# Altium PCB SBM_BMS.PcbDoc (part 3 of 4)
Units mil, origin at the board's own origin, x right, y up, seen from the top; angles counter-clockwise.
Board outline 7537.59 x 2875 mil, 2 copper layers (Top Layer, Bottom Layer), stack 64.961 mil thick; 180 components, 137 nets, 631 pads, 494 vias.
Unrouted connection lines stored in the file: 10.
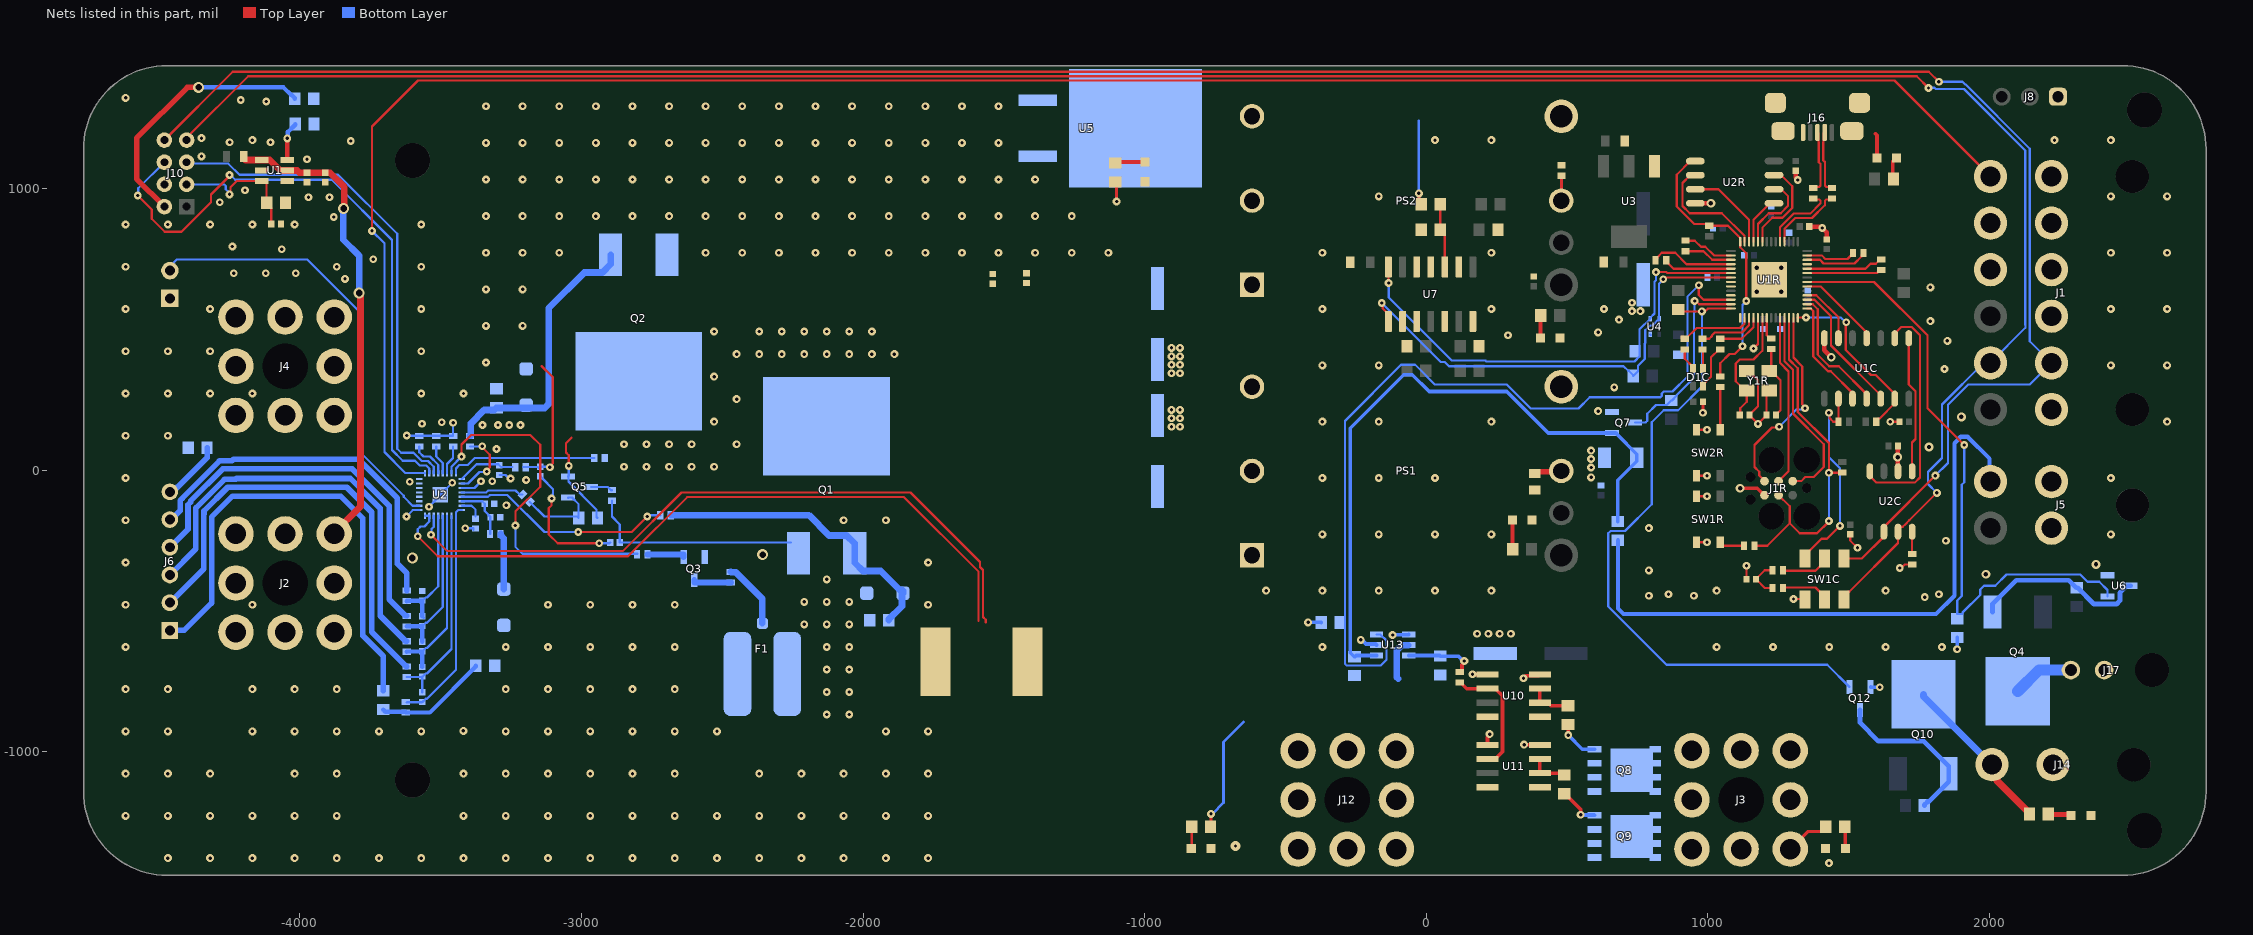
[diagram p2: the nets of this part, all layers, seen from the top]

## Via types
v1: diameter 28, hole 12, Top Layer to Bottom Layer, tented both sides, 377 vias
v2: diameter 27.56, hole 11.81, Top Layer to Bottom Layer, tented both sides, 89 vias
v3: diameter 31.5, hole 15.75, Top Layer to Bottom Layer, tented both sides, 14 vias
v4: diameter 45.28, hole 27.56, Top Layer to Bottom Layer, tented both sides, 6 vias
v5: diameter 39.37, hole 23.62, Top Layer to Bottom Layer, tented both sides, 5 vias
v6: diameter 36, hole 12, Top Layer to Bottom Layer, tented both sides, 1 vias
v7: diameter 28, hole 12, Top Layer to Bottom Layer, 1 vias
v8: diameter 30, hole 12, Top Layer to Bottom Layer, tented both sides, 1 vias

## Nets (pads, with @x,y where several pads share a name; then routed paths per layer and width w, separated by ;. In a path a pad name is that pad's centre, name@x,y a point inside that pad or via, vN(x,y) a via of type N, cw(c..) or ccw(c..) an arc to the next point about the centre after c; other vN are vias at no path point) (continued)
BAT-: C7.2 C8.1 C9.2 C10.2 C11.2 C14.2 C15.1 C16.1 J4.1 J9.1 J10.4 Q3.2 R1.2 R20.1 R21.2 R22.2 R23.2 SB3.1 U1.2 U1.4 U2.7 U2.8 U2.9 U2.11 U2.12 U2.13 U2.14 U2.15 U2.16 U2.27 U2.33 | length 3052.6
  Top Layer w7.87: v2(-3582,-234) -3511,-305 -2835,-305 -2625,-95 -1855,-95 -1590,-360 -1590,-535.33
  Bottom Layer w7.87: v2(-3622,-164) -3622,-163.41 -3599.72,-141.13 U2.9@-3576.68,-141.13 ; v2(-3621.29,123.99) -3620.64,123.34 -3576.94,123.34 R21.2@-3576.29,122.69 R22.2@-3516.29,122.69 R23.2@-3456.29,122.69 v2(-3456.29,168.99) ; v2(-3582,-234) -3582,-209 -3572,-199 -3558.18,-199 -3540.66,-181.48 U2.7@-3540.66,-161.4 U2.8@-3556.41,-161.4 ; v2(-3542,-129) -3501.29,-88.29 U2.33@-3501.29,-86.01 v2(-3459.35,-44.07) ; U2.27@-3425.9,-62.39 -3380.39,-62.39 v2(-3357,-39) ; v2(-3413.47,-205.22) -3413.02,-205.67 -3384.87,-205.67 -3383.47,-207.08 C8.1@-3383.47,-211.81 ; C14.2@-3292,-16.13 -3270.2,-16.13 -3257.33,-29 v2(-3252,-29)
  other v1: -4469.29,-1377.01 -4319.29,-1377.01 -4169.29,-1377.01 -4019.29,-1377.01 -3869.29,-1377.01 -3719.29,-1377.01 -3569.29,-1377.01 -3419.29,-1377.01 -3269.29,-1377.01 -3119.29,-1377.01 -2969.29,-1377.01 -2819.29,-1377.01 -2669.29,-1377.01 -2519.29,-1377.01 -2369.29,-1377.01 -2219.29,-1377.01 -2069.29,-1377.01 -1919.29,-1377.01 -1769.29,-1377.01 -4619.29,-1227.01 -4469.29,-1227.01 -4319.29,-1227.01 -4169.29,-1227.01 -4019.29,-1227.01 -3869.29,-1227.01 -3419.29,-1227.01 -3269.29,-1227.01 -3119.29,-1227.01 -2969.29,-1227.01 -2819.29,-1227.01 -2669.29,-1227.01 -2519.29,-1227.01 -2369.29,-1227.01 -2219.29,-1227.01 -2069.29,-1227.01 -1919.29,-1227.01 -1769.29,-1227.01 -4619.29,-1077.01 -4469.29,-1077.01 -4319.29,-1077.01 -2369.29,-1077.01 -2219.29,-1077.01 -2069.29,-1077.01 -1919.29,-1077.01 -1769.29,-1077.01 -4619.29,-927.01 -4469.29,-927.01 -1919.29,-927.01 -1769.29,-927.01 -4619.29,-777.01 -4469.29,-777.01 -4619.29,-627.01 -4619.29,-477.01 -1769.29,-477.01 -4619.29,-327.01 -1769.29,-327.01 -4619.29,-177.01 -2069.29,-177.01 -1919.29,-177.01 -4619.29,-27.01 -4619.29,122.99 -4469.29,122.99 -4619.29,272.99 -4469.29,272.99 -4319.29,272.99 -4169.29,272.99 -3569.29,272.99 -3419.29,272.99 -4619.29,422.99 -4469.29,422.99 -4319.29,422.99 -3569.29,422.99 -4619.29,572.99 -4319.29,572.99 -3569.29,572.99 -4619.29,722.99 -3869.29,722.99 -3569.29,722.99 -4619.29,872.99 -4469.29,872.99 -4319.29,872.99 -4169.29,872.99 -4019.29,872.99 -3569.29,872.99 -4169.29,1172.99 -4619.29,1322.99
  other v2: -3267,-124 -3610,-40 -3317,-39 -3197,-34 -3302,76 -3352,161 -3297,161 -3257,161 -3217,161 -3567,166 -3497,171 -3840,680 -4235,700 -4121.38,699.79 -4015,700 -3740,750 -4065,785 -4240,795 -3880,900 -4285,952 -3970,970 -3895,970 -4195,995 -3975,1105 -4350,1115 -4250,1165 -4105,1165 -3820,1170 -4350,1180 -4120,1310 -4210,1315
  other v5: -3601,-311 -2357,-299
CAN_H: J1.8 J10.7 SW1C.4 U2C.7 | length 8655.2
  Top Layer w7.87: SW1C.4@1482.56,-458.86 1482.56,-447.05 1498.31,-431.3 1501.65,-431.3 1674.88,-258.07 U2C.7@1674.88,-217.72 U2C.7@1674.88,-207.8 ; U2C.7@1674.88,-200.98 U2C.7@1674.88,-207.8 ; v1(1812.84,-79.76) 1715.24,-177.36 1715.1,-177.36 1701.26,-191.2 1701.26,-191.34 1692.08,-200.52 1682.16,-200.52 U2C.7@1674.88,-207.8
  Top Layer w8: J10.7@-4402.68,1173.11 -4402.68,1181.06 -4183.74,1400 1741,1400 v1(1783,1358)
  Bottom Layer w7.87: v1(1812.84,-79.76) 1781.55,-48.47 1781.55,-5.45 1831,44 1831,234 1978.97,381.97 J1.8@2003.03,381.97 2127.13,506.06 2127.13,516.86
  Bottom Layer w8: v1(1783,1358) 1784.09,1359.09 1804.31,1359.09 1809.28,1354.13 1908.87,1354.13 2127.13,1135.87 2127.13,516.86
CAN_L: J1.2 J10.8 SW1C.1 U2C.6 | length 8795.9
  Top Layer w8: J10.8@-4481.42,1173.11 -4238.65,1415.87 1784.13,1415.87 v1(1820,1380) ; SW1C.1@1482.56,-313.19 1546.14,-313.19 1624.88,-234.45 U2C.6@1624.88,-217.72 1624.88,-200.98 v1(1807.36,-18.5)
  Bottom Layer w8: v1(1807.36,-18.5) 1852.43,26.57 1852.43,233.07 1924.36,305 2142.6,305 J1.2@2219.57,381.97 2143,458.54 2143,510.28 2143,1142.45 1915.45,1370 1914,1370 1904,1380 v1(1820,1380)
CANCLK_RP2CAN: U1C.6 U1R.32 | length 217.8
  Top Layer w7.87: U1R.32@1352.15,621.85 1385,621.85 1463.27,543.58 U1C.6@1463.27,469.29
CANRX_RP2CAN: U1C.2 U2C.4 | length 845.6
  Top Layer w7.87: U2C.4@1574.88,-3.15 1574.88,-19.88 1598.5,-43.5 1734.67,-43.5 1752.83,-25.34 1752.83,479.86 1723.05,509.65 1686.89,509.65 1663.27,486.02 U1C.2@1663.27,469.29
CANTX_RP2CAN: U1C.1 U2C.1 | length 487.4
  Top Layer w7.87: U1C.1@1713.27,469.29 1713.27,304.86 1737.09,281.04 1737.09,111.4 1724.88,99.19 U2C.1@1724.88,-3.15
DBG_TX_RP2040: J1R.5 U1R.27 | length 714.8
  Top Layer w7.87: J1R.5@1200.67,-38.19 1200.67,-36.69 1182.11,-18.13 1182.11,-5.1 1165.23,11.78 1165.23,89.96 1227.44,152.17 1249.47,152.17 v2(1252.61,155.31) ; U1R.27@1303.43,541.63 1303.43,400.64 1334.92,369.15 1334.92,234.73 1344.76,224.89 v2(1344.76,220.28)
  Bottom Layer w7.87: v2(1252.61,155.31) 1313.85,216.55 1341.04,216.55 v2(1344.76,220.28)
Detect: J1.12 U2.17 | length 7306
  Top Layer w7.87: v1(-3744.09,850.39) -3744.09,1220.91 -3580.81,1384.19 1662.23,1384.19 J1.12@2003.03,1043.39
  Bottom Layer w7.87: v1(-3744.09,850.39) -3700,806.3 -3700,65 -3626,-9 -3556.41,-9 U2.17@-3556.41,-10.61
GND_RP2CAN: C1C.2 C1R.2 C2C.1 C2R.2 C3C.2 C3R.2 C4C.2 C4R.2 C5C.2 C5R.2 C6R.2 C7R.2 C8R.2 C9R.2 C10R.2 C11R.2 C12.2 C12R.2 C13.2 C13R.2 C20.2 C21.2 C22.2 C23.2 C24.2 C25.2 C26.2 C27.2 C28.2 C80.2 C81.2 D4.2 D5.2 D6.2 D7.2 D8.2 D9.2 D10.2 J1.1 J1.3 J1.4 J1.5 J1.6 J1R.6 J5.1 J5.2 J8.1 J12.1 J14.1 J16.5 J16.6 J16.7 J16.8 J16.9 J17.1 PS1.2 PS1.3 PS1.4 PS2.2 PS2.3 PS2.4 Q7.2 Q12.2 R6C.2 R18.2 R20.2 R30.1 R31.2 R36.1 R54.2 R55.2 R56.2 R57.2 SW1C.6 SW1R.B1 SW1R.B2 SW2R.B1 SW2R.B2 U1C.7 U1R.19 U1R.57 U2.6 U2C.2 U2R.4 U3.1 U4.4 U6.2 U7.2 U7.4 U7.5 U7.9 U7.10 U7.12 U7.14 U10.4 U10.5 U11.4 U11.5 U13.2 U13.4 Y1R.2 Y1R.4 | length 4150.7
  Top Layer w7.87: v2(-3534.76,-229) -3477.02,-286.74 -2853.55,-286.74 -2645,-78.19 -1831.81,-78.19 -1585,-325 -1585,-342.73 -1574.25,-353.48 -1574.25,-520.75 -1565,-530 -1565,-540 ; SW1R.B2@958.94,-255.12 v2(996.34,-255.12) ; SW2R.B2@958.94,-18.9 v2(996.34,-18.9) ; SW2R.B1@958.94,144.49 v2(996.34,144.49) ; SW1R.B1@962.68,-91.61 962.8,-91.73 v2(996.34,-91.73) ; C2C.1@1136.69,-386.02 v2(1136.69,-338.78) ; v2(1161.69,432.87) 1177.44,448.62 U1R.19@1177.44,541.63 ; v3(1173.5,633.66) U1R.57@1177.44,629.72 ; v2(1303.43,-456.89) 1342.8,-456.89 SW1C.6@1344.76,-458.86 ; C3C.2@1505,-227.13 1505.46,-227.59 1505.46,-249.48 v2(1531.15,-275.17) ; v2(1681.38,-346.65) 1685.51,-346.65 1698.31,-333.86 R6C.2@1724.88,-333.86
  Top Layer w8: SW1R.B1@960,-94.29 SW1R.B1@962.68,-91.61 ; Y1R.4@1138.07,353.27 1143.98,353.27 1177.5,319.74 1177.5,227.62 1147.32,197.44 C1R.2@1147.32,196.65 1147.32,195.87 v2@1177.44,165.75 ; v2(1177.44,165.16) v2@1177.44,165.75 ; Y1R.2@1218.07,283.27 1207.56,272.76 C2R.2@1207.56,196.65 1207.56,195.87 v2@1177.44,165.75 ; v2(1647.13,173.03) C1C.2@1680,173.03 C1C.2@1682.13,173.03
  Top Layer w9.84: v2(981.97,204.53) C5C.2@981.97,243.9
  Top Layer w11.81: v3(1114.13,-63.27) 1175.76,-63.27 J1R.6@1200.67,-88.19
  Top Layer w13: 1595,1195 1600,1190 D7.2@1600,1110
  Top Layer w15.75: U2R.4@954.94,948.43 v3(1010.22,948.43) ; C3R.2@1311.3,1064.17 1311.3,1039.17 v2(1319.17,1031.3) ; C4R.2@1359.92,865.94 1397.67,865.94 1402.59,861.02 v2(1405.79,861.02) 1421.76,845.05 1421.76,820.3 C10R.2@1421.54,820.08 ; U1C.7@1413.27,469.29 1413.27,426.45 v3(1437.81,401.91) ; U2C.2@1674.88,-3.15 1674.19,-2.46 1674.19,46.36 v3(1673.5,47.05) 1674.19,47.74 1674.19,85.73 C4C.2@1674.88,86.42
  Bottom Layer w7.87: v2(-3534.76,-229) -3533.23,-227.48 -3533.23,-208.12 -3524.91,-199.8 U2.6@-3524.91,-161.4
  Bottom Layer w8: U4.4@795,482.88 U4.4@796.91,480.98
  Bottom Layer w13: v1(-420,-539.66) -373.84,-539.66 R36.1@-373.5,-540 ; v1(-233,-602) -228.94,-602 -214.44,-616.5 -180.5,-616.5 U13.2@-177,-620 ; v1(-120,-584.66) -118.97,-583.63 -64.03,-583.63 U13.4@-63,-582.6 ; Q12.2@1577.5,-769 1578.5,-770 v1(1610,-770) ; v1(1885,-635) R18.2@1885,-593.5
  other v1: 1430,-1394.66 -369.29,-627.01 1030.71,-627.01 1230.71,-627.01 1430.71,-627.01 1630.71,-627.01 1830.71,-627.01 180,-580 220,-580 260,-580 300,-580 1770,-450 790,-445 950,-445 860,-440 1820,-440 -569.29,-427.01 -369.29,-427.01 -169.29,-427.01 30.71,-427.01 230.71,-427.01 1030.71,-427.01 1630.71,-427.01 790,-355 1845,-250 -369.29,-227.01 -169.29,-227.01 30.71,-227.01 230.71,-227.01 2430.71,-227.01 790,-205 -369.29,-27.01 -169.29,-27.01 30.71,-27.01 2430.71,-27.01 585,-24.66 585,10.34 585,40.34 585,70.34 -905,155 -875,155 -369.29,172.99 -169.29,172.99 230.71,172.99 2630.71,172.99 -905,185 -875,185 610,210.34 -905,215 -875,215 667,295 -905,345 -875,345 1840,360 -369.29,372.99 -169.29,372.99 2430.71,372.99 2630.71,372.99 -905,375 -875,375 -905,405 -875,405 -905,435 -875,435 1850,460 290,480 610,490 1790,530 684.13,535.45 730,565.34 760,565.34 -369.29,572.99 230.71,572.99 630.71,572.99 2430.71,572.99 2630.71,572.99 730,595.34 1790,650 -369.29,772.99 230.71,772.99 2430.71,772.99 2630.71,772.99 -169.29,972.99 2430.71,972.99 2630.71,972.99 30.71,1172.99 230.71,1172.99 2230.71,1172.99 2430.71,1172.99
  other v3: 1987,-369 2378,-334 1785,83 1900,190 1260.12,633.66 1173.5,720.28 1260.12,720.28
  other v6: -678,-1334
INT_RP2CAN: U1C.4 U1R.34 | length 297.2
  Top Layer w7.87: U1R.34@1354.61,653.35 1400.21,653.35 1563.27,490.29 U1C.4@1563.27,469.29
Kill_SWITCH: J5.4 R49.2 | length 2262.9
  Bottom Layer w15: R49.2@680,-248.5 680,-490 700,-510 1810,-510 1875,-445 1875,96.54 1897.83,119.37 1922.17,119.37 1999.99,41.56 1999.99,-36.52 J5.4@2003.46,-40
LEDB_RP2CAN: R8C.1 U1R.18 | length 168.1
  Top Layer w7.87: R8C.1@1043.58,467.32 1120.24,467.32 1161.69,508.78 U1R.18@1161.69,541.63
LEDG_RP2CAN: R7C.1 U1R.17 | length 213.3
  Top Layer w7.87: R7C.1@980.59,467.32 1004.21,467.32 1014.07,477.18 1014.07,480.1 1023.93,489.96 1120.6,489.96 1145.94,515.3 U1R.17@1145.94,541.63
LEDR_RP2CAN: R5C.1 U1R.16 | length 255
  Top Layer w7.87: R5C.1@917.6,467.32 921.54,467.32 959.92,505.71 1114.08,505.71 1130.2,521.82 U1R.16@1130.2,541.63
MISO_RP2CAN: U1C.12 U1R.31 | length 475
  Top Layer w7.87: U1R.31@1352.15,606.1 1378.48,606.1 1436.89,547.69 1436.89,443.57 1613.27,267.2 U1C.12@1613.27,254.72
MOSI_RP2CAN: U1C.11 U1R.30 | length 454.6
  Top Layer w7.87: U1R.30@1352.15,590.35 1371.96,590.35 1389.65,572.66 1389.65,411.1 1430.86,369.88 1464.84,369.88 1563.27,271.46 U1C.11@1563.27,254.72
MOTOR_EN: R38.2 R45.2 U13.6 | length 254.8
  Top Layer w13: R45.2@118,-716.3 121.94,-716.3 126.26,-711.97 126.26,-690.34 135,-681.6 v8(135,-677)
  Bottom Layer w13: U13.6@-63,-657.4 46.9,-657.4 R38.2@49,-659.5 112.9,-659.5 130.4,-677 v8(135,-677)
MOTOR_PWR: J3.1 Q8.D Q9.D R46.1 | length 160.2
  Top Layer w12: J3.1@1292.31,-1344.61 1354.41,-1282.5 1404.5,-1282.5 1418.5,-1268.5 R46.1@1418.5,-1266
nCS_RP2CAN: R4C.2 U1C.13 U1R.28 | length 646.2
  Top Layer w7.87: U1R.28@1319.17,541.63 1319.17,543.11 v2(1348.31,543.11) ; v2(1491.2,526.16) 1489.65,524.61 1489.65,427.76 1578.76,338.65 1596.08,338.65 1663.27,271.46 U1C.13@1663.27,254.72 1663.27,237.99 1609.13,183.86 1604.61,183.86 1597.72,176.97 R4C.2@1597.72,173.03
  Bottom Layer w7.87: v2(1348.31,543.11) 1471.96,543.11 1488.91,526.16 v2(1491.2,526.16)
NetC1_1: C1.1 C2.2 | length 464.2
  Top Layer w7.87: v2(-3106.4,-99.6) -3106.4,-123.4 -3116.4,-133.4 -3116.4,-227.56 -3084.97,-259 v2(-2937,-259)
  Bottom Layer w7.87: C2.2@-3147,-21.13 -3146.21,-21.13 -3139.13,-28.21 -3139.13,-29 -3101.4,-66.72 -3101.4,-83.4 -3102.64,-84.64 -3102.64,-95.83 v2(-3106.4,-99.6) ; v2(-2937,-259) -2901.41,-259 C1.1@-2898.42,-256.01
NetC1_2: C1.2 D1.1 F1.1 Q1.2 R2.1 R26.1 | length 768
  Bottom Layer w7.87: R26.1@-2892,-107.7 -2892,-164 -2864.17,-191.83 C1.2@-2864.17,-256.01 Q1.2@-2256,-256.01
  other v1: -2129.29,-867.01 -2049.29,-867.01 -2129.29,-787.01 -2049.29,-787.01 -2129.29,-707.01 -2049.29,-707.01 -2129.29,-627.01 -2049.29,-627.01 -2209.29,-547.01 -2129.29,-547.01 -2049.29,-547.01 -2209.29,-467.01 -2129.29,-467.01 -2049.29,-467.01 -2129.29,-387.01
NetC2C_2: C2C.2 R2C.2 R3C.2 | length 144.3
  Top Layer w7.87: R3C.2@1229.61,-417.52 1201.65,-417.52 1170.94,-386.81 C2C.2@1170.94,-386.02 1170.94,-385.24 1201.65,-354.53 R2C.2@1229.61,-354.53
NetC2R_1: C2R.1 R1R.2 Y1R.3 | length 263.4
  Top Layer w8: R1R.2@1224.69,430.98 1224.69,359.88 Y1R.3@1218.07,353.27 1223.98,353.27 1257.5,319.74 1257.5,213.13 1241.81,197.44 C2R.1@1241.81,196.65
NetC3_1: C3.1 R4.1 U2.1 U2.32 | length 807.1
  Bottom Layer w7.87: R4.1@-3620.69,-824.03 -3619.91,-823.24 -3566.48,-823.24 C3.1@-3565.69,-822.46 -3564.91,-822.46 -3553.49,-811.04 -3548.99,-811.04 -3446.17,-708.22 -3446.17,-162.78 -3446.17,-148.17 -3439.13,-141.13 U2.32@-3424.52,-141.13
NetC3_2: C3.2 C4.1 R10.1 U2.2 | length 724.5
  Bottom Layer w7.87: R10.1@-3620.69,-734.03 -3619.91,-733.24 C4.1@-3566.48,-733.24 ; C3.2@-3565.69,-788.2 C4.1@-3565.69,-734.03 ; C4.1@-3565.69,-732.46 -3564.91,-732.46 -3553.49,-721.04 -3548.99,-721.04 -3461.92,-633.97 U2.2@-3461.92,-162.78
NetC4_2: C4.2 C5.1 R11.1 U2.3 | length 631.2
  Bottom Layer w7.87: C5.1@-3566.48,-643.24 -3565.69,-643.24 -3553.49,-631.04 -3548.99,-631.04 -3477.67,-559.72 U2.3@-3477.67,-161.4
  Bottom Layer w15.75: R11.1@-3620.69,-644.03 -3619.91,-643.24 C5.1@-3566.48,-643.24 ; C4.2@-3565.69,-698.2 C5.1@-3565.69,-643.24
NetC5_2: C5.2 C6.1 R12.1 U2.4 | length 536.1
  Bottom Layer w7.87: C6.1@-3565.69,-552.46 -3564.91,-552.46 -3553.49,-541.04 -3548.99,-541.04 -3493.42,-485.47 -3493.42,-176.36 U2.4@-3493.42,-160.81
  Bottom Layer w15.75: R12.1@-3620.69,-554.03 -3619.91,-553.24 -3566.48,-553.24 C6.1@-3565.69,-552.46 C5.2@-3565.69,-608.2
NetC6_2: C6.2 C7.1 R15.1 U2.5 | length 444.7
  Bottom Layer w7.87: C6.2@-3565.69,-518.2 C6.2@-3560.69,-523.2 ; C7.1@-3565.69,-462.46 -3564.91,-462.46 -3553.49,-451.04 -3548.99,-451.04 -3509.17,-411.21 U2.5@-3509.17,-160.81
  Bottom Layer w15.75: R15.1@-3620.69,-464.03 -3619.91,-463.24 C7.1@-3566.48,-463.24 ; C6.2@-3565.69,-518.2 C7.1@-3565.69,-463.24
NetC8_2: C8.2 U2.31 | length 78.3
  Bottom Layer w7.87: U2.31@-3424.52,-125.38 -3390.62,-125.38 -3376.29,-139.71 C8.2@-3376.29,-163.88
NetC14_1: C14.1 R8.2 U2.25 | length 206.8
  Bottom Layer w7.87: U2.25@-3425.9,-30.89 -3373.42,21.59 -3295.46,21.59 -3285.5,11.63 R8.2@-3244.99,11.63
NetC15_2: C15.2 C16.2 R13.1 U2.30 | length 202.4
  Bottom Layer w7.87: U2.30@-3425.9,-109.63 -3352.71,-109.63 -3344.13,-118.21 C16.2@-3344.13,-119 -3344.13,-144.51 -3323.42,-165.22 C15.2@-3323.42,-166.01 -3324.2,-166.8 -3324.2,-225.22 R13.1@-3324.99,-226.01
NetC26_1: C26.1 Q7.1 R48.2 R49.1 U13.1 | length 2378.7
  Bottom Layer w13: U13.1@-177,-657.4 -248.4,-657.4 -252.5,-661.5 -256.5,-661.5 -270,-648 -270,150 -80,340 -50,340 10,280 285,280 432.5,132.5 Q7.1@659,132.5 673,132.5 677.5,128 677.5,127.18 747.48,57.2 C26.1@747.48,45 747.48,32.8 680,-34.69 R49.1@680,-181.5
NetD1_2: D1.2 Q1.1 R2.2 R5.1 | length 1101.2
  Bottom Layer w24: R5.1@-2683.3,-159 -2193,-159 -2121,-231 -2059,-231 -2030,-260 Q1.1@-2030,-294 -2030,-328 -2001,-357 -1937.63,-357 -1870.65,-423.98 -1862.38,-423.98 -1858.63,-427.73 D1.2@-1858.63,-436 -1862.38,-439.75 -1862.38,-482.38 -1909.5,-529.5 R2.2@-1909.5,-532
NetD1C_1: D1C.1 R5C.2 | length 80.1
  Top Layer w7.87: R5C.2@917.6,429.92 917.6,396.46 947.13,366.93 D1C.1@947.13,362.01
NetD1C_2: D1C.2 R7C.2 | length 68.7
  Top Layer w7.87: R7C.2@980.59,429.92 982.56,427.95 D1C.2@982.56,362.01
NetD1C_3: D1C.3 R8C.2 | length 158.5
  Top Layer w7.87: D1C.3@982.56,299.02 982.56,303.94 1011.1,332.48 1011.1,401.38 1039.65,429.92 R8C.2@1043.58,429.92
NetD2_2: D2.2 Q2.1 R3.2 R7.1 | length 1010.8
  Bottom Layer w23.62: R7.1@-3396.29,122.69 -3394.32,122.69 -3393.34,123.68 -3393.34,166.99 -3346.01,214.31 -3310.19,214.31 R3.2@-3302,222.5 ; R3.2@-3302,221.75 -3130.84,221.75 -3117,235.59 -3117,576 -2990.19,702.81 -2926.19,702.81 -2897,732 Q2.1@-2897,766
NetD3_2: D3.2 R13.2 | length 200.3
  Bottom Layer w23.62: R13.2@-3287.59,-226.01 -3287.59,-229.94 -3276.29,-241.24 D3.2@-3276.29,-421.64
NetD4_1: D4.1 R41.2 | length 103.3
  Top Layer w13: D4.1@305.71,-177.01 305.71,-279.21 R41.2@306.5,-280
NetD5_1: D5.1 R44.2 | length 76.6
  Top Layer w10: D5.1@-835,-1342 -833.5,-1340.5 R44.2@-833.5,-1266
NetD6_1: D6.1 R40.2 | length 107.9
  Top Layer w13: R40.2@-1105.78,1090 R40.2@-1104.29,1091.49 -1100.78,1095 D6.1@-1000,1095
NetD7_1: D7.1 R39.2 | length 81
  Top Layer w13: R39.2@1655.62,1035 1655.62,1095.62 D7.1@1670,1110
NetD8_1: D8.1 R46.2 | length 77
  Top Layer w12: R46.2@1485.5,-1266 1488,-1268.5 D8.1@1488,-1342
NetD9_1: D9.1 R42.2 | length 80.6
  Top Layer w13: D9.1@405,470 405,548.5 R42.2@406.5,550
NetD10_1: D10.1 R19.2 | length 83.6
  Top Layer w17: R19.2@2208.5,-1220 2211,-1222.5 2287.5,-1222.5 D10.1@2290,-1225
NetDNP1_1: DNP1.1 U1R.2 | length 183.1
  Top Layer w7.87: DNP1.1@920,815.7 953.3,815.7 974.95,794.05 990.8,794.05 1021.26,763.58 U1R.2@1081.48,763.58
NetDNP1_2: DNP1.2 U1R.3 | length 174.1
  Top Layer w7.87: DNP1.2@920,778.3 984.28,778.3 1014.74,747.83 U1R.3@1081.48,747.83
NetDNP2_1: DNP2.1 U1R.4 | length 297.8
  Top Layer w7.87: DNP2.1@814.3,746 821.19,752.89 821.19,757.78 835.98,772.57 883.43,772.57 923.92,732.09 U1R.4@1081.48,732.09
NetDNP2_2: DNP2.2 U1R.5 | length 244.4
  Top Layer w7.87: DNP2.2@851.7,746 851.7,742.06 877.43,716.34 U1R.5@1081.48,716.34
NetDNP3_1: DNP3.1 U1R.40 | length 224.1
  Top Layer w7.87: U1R.40@1352.15,747.83 1397.72,747.83 1410.55,735 1520.59,735 1545.81,760.22 1545.81,765.11 DNP3.1@1552.7,772
NetDNP3_2: DNP3.2 U1R.41 | length 179.4
  Top Layer w7.87: U1R.41@1352.15,763.58 1365.43,763.58 1404.24,763.58 1416.82,751 1495.83,751 1506,761.17 1508.41,761.17 1515.3,768.06 DNP3.2@1515.3,772
NetDNP4_1: DNP4.1 U1R.37 | length 267.3
  Top Layer w7.87: U1R.37@1352.15,700.59 1600.35,700.59 1611.06,711.3 DNP4.1@1615,711.3
NetDNP4_2: DNP4.2 U1R.38 | length 276.3
  Top Layer w7.87: U1R.38@1352.15,716.34 1559.31,716.34 1576.91,733.94 1596.3,733.94 1611.06,748.7 DNP4.2@1615,748.7
NetF1_3: F1.3 R24.1 | length 238.5
  Bottom Layer w23.62: R24.1@-2470,-360.3 -2469.02,-361.28 -2452.99,-361.28 -2358,-456.27 F1.3@-2358,-543.04
NetJ6_1: J6.1 SB2.2 | length 1736.4
  Bottom Layer w20: J6.1@-4462.02,-568.28 -4411.28,-568.28 -4314,-471 -4314,-166 -4239.5,-91.5 -3855.5,-91.5 -3776.68,-170.32 -3776.68,-587.15 -3704,-659.84 SB2.2@-3704,-782.5
NetJ6_2: J6.2 R10.2 | length 1643.6
  Bottom Layer w20: J6.2@-4462.02,-469.85 -4341.87,-349.71 -4341.87,-154.45 -4341,-153.58 -4341,-144.45 -4256.55,-60 -3834,-60 -3745.18,-148.81 -3745.18,-574.11 -3622.66,-696.63 R10.2@-3620.69,-696.63
NetJ6_3: J6.3 R11.2 | length 1531.1
  Bottom Layer w20: J6.3@-4462.02,-371.43 -4370,-279.41 -4370,-173.45 -4369.75,-173.2 -4369.75,-133.78 -4268.1,-32.13 -4228.68,-32.13 -4225.43,-28.87 -3820.96,-28.87 -3715,-134.83 -3715,-516.26 -3624.63,-606.63 R11.2@-3620.69,-606.63
NetJ6_4: J6.4 R12.2 | length 1421.3
  Bottom Layer w20: J6.4@-4462.02,-273 -4397.87,-208.86 -4397.87,-122.48 -4388.22,-112.83 -4388.22,-108.15 -4274.07,6 -3815,6 -3683.03,-125.97 -3683.03,-189.28 ; -3683,-189.31 -3683,-458.26 -3624.63,-516.63 R12.2@-3620.69,-516.63
NetJ6_5: J6.5 R15.2 | length 1317.6
  Bottom Layer w20: J6.5@-4462.02,-174.57 -4456.96,-174.57 -4425.75,-143.36 -4425.75,-106.88 -4416.1,-97.23 -4416.1,-96.61 -4285.62,33.87 -4241.52,33.87 -4235.39,40 -3793,40 -3654.15,-98.85 -3654.15,-177.32 ; -3654.13,-177.35 -3654.13,-331.35 -3620.69,-364.78 R15.2@-3620.69,-426.63
NetJ6_6: J6.6 SB3.2 | length 217.2
  Bottom Layer w20: J6.6@-4462.02,-76.15 -4453.05,-76.15 -4437.67,-60.76 -4435.76,-60.76 -4330,45 SB3.2@-4330,80
NetJ9_2: J9.2 U2.10 | length 1562.3
  Bottom Layer w7.87: J9.2@-4470.12,717.17 -4438.07,749.21 -3974.21,749.21 -3776.81,551.81 -3776.81,55.36 -3631.84,-89.6 -3631.84,-93.84 -3600.31,-125.38 U2.10@-3576.68,-125.38
NetJ10_2: J10.2 R25.2 | length 938
  Top Layer w19: J10.2@-4481.42,936.89 -4580,1035.47 -4580,1180 -4400,1360 v5(-4360,1360)
  Bottom Layer w15.75: v5(-4360,1360) -4170,1360 -4058.5,1360 -4033.13,1334.63 -4030.63,1334.63 -4018.5,1322.5 R25.2@-4018.5,1320
NetPS1_6: PS1.6 R30.2 | length 96.1
  Top Layer w20: R30.2@385,-6.5 387.27,-4.23 476.95,-4.23 PS1.6@479.21,-1.97
NetPS2_6: PS2.6 R31.1 | length 88.6
  Top Layer w10: PS2.6@479.21,958.03 479.61,958.43 479.61,1045.91 R31.1@480,1046.3
NetQ1_3: Q1.3 Q2.3 Q5.2 R6.1 R27.2 | length 341.6
  Top Layer w7.87: v2(-3045.66,16) -3045.66,53.74 -3055.5,63.58 -3055.5,96 -3035.5,116
  Bottom Layer w7.87: v2(-3045.66,16) -3045.66,-19.16 Q5.2@-3048,-21.5 -3046.3,-23.2 -3046.3,-39.7 -2946.7,-139.3 -2946.7,-165.8 R27.2@-2943.5,-169
  other v1: -2849.29,12.99 -2769.29,12.99 -2689.29,12.99 -2609.29,12.99 -2529.29,12.99 -2849.29,92.99 -2769.29,92.99 -2689.29,92.99 -2609.29,92.99 -2449.29,92.99 -2529.29,172.99 -2449.29,252.99 -2529.29,332.99 -2449.29,412.99 -2369.29,412.99 -2289.29,412.99 -2209.29,412.99 -2129.29,412.99 -2049.29,412.99 -1969.29,412.99 -1889.29,412.99 -2529.29,492.99 -2369.29,492.99 -2289.29,492.99 -2209.29,492.99 -2129.29,492.99 -2049.29,492.99 -1969.29,492.99
NetQ3_1: Q3.1 R9.2 | length 137.5
  Bottom Layer w21: R9.2@-2765.3,-298 -2638,-298 -2637.5,-298.5 Q3.1@-2637.5,-308
NetQ3_3: Q3.3 R24.2 | length 137.4
  Bottom Layer w21: Q3.3@-2600,-390 -2600,-397.2 -2599.5,-397.7 R24.2@-2470,-397.7
NetQ4_1: Q4.1 R17.2 U6.3 | length 632.5
  Bottom Layer w17: Q4.1@2010,-502.5 2010,-475 2095,-390 2281,-390 2307.5,-416.5 R17.2@2310,-416.5 2312.5,-416.5 2370.87,-474.87 2450.78,-474.87 2462.8,-462.85 2462.8,-434.2 2487,-410 U6.3@2501,-410
NetQ5_1: Q5.1 R27.1 R28.1 | length 294.4
  Bottom Layer w7.87: R28.1@-3183.78,-112.22 -3132,-164 -3015.5,-164 R27.1@-3010.5,-169 -3010.5,-120 -3034,-96.5 Q5.1@-3048,-96.5 Q5.1@-3047,-97.5
NetQ5_3: Q5.3 R26.2 | length 78.7
  Bottom Layer w7.87: Q5.3@-2966,-59 -2907.24,-59 -2895.94,-70.3 R26.2@-2892,-70.3
NetQ8_4: Q8.4 R14.2 | length 153.5
  Top Layer w13: R14.2@503,-902.5 504,-903.5 v1(504,-940) v1@505,-941
  Bottom Layer w13: v1(504,-940) 554,-990 Q8.4@597.5,-990
NetQ9_4: Q9.4 R16.2 | length 150.3
  Top Layer w13: R16.2@490,-1148.5 492.5,-1148.5 548,-1204 v1(548,-1223)
  Bottom Layer w13: v1(548,-1223) 549,-1224 596.5,-1224 Q9.4@597.5,-1225
NetQ10_1: Q10.1 Q12.3 R37.2 | length 602
  Bottom Layer w17: Q12.3@1540,-851 1540,-896 1605.5,-961.5 1766.5,-961.5 1855,-1050 Q10.1@1855,-1077.5 1855,-1105 1784,-1176 1780,-1176 1768.5,-1187.5 R37.2@1768.5,-1190
NetR2C_1: R2C.1 SW1C.2 | length 172.3
  Top Layer w7.87: R2C.1@1267.01,-354.53 1268.98,-356.5 1382.17,-356.5 1413.66,-325 SW1C.2@1413.66,-313.19
NetR3C_1: R3C.1 SW1C.5 | length 172.3
  Top Layer w7.87: R3C.1@1267.01,-417.52 1268.98,-415.55 1382.17,-415.55 1413.66,-447.05 SW1C.5@1413.66,-458.86
NetR4_2: R4.2 SB1.2 SB2.1 | length 402.8
  Bottom Layer w15.75: SB2.1@-3704,-849.5 -3696.75,-856.75 -3626.95,-856.75 R4.2@-3624,-859.7 -3538.7,-859.7 -3375.5,-696.5 SB1.2@-3375.5,-694
NetR5_2: R5.2 U2.29 | length 787.3
  Top Layer w7.87: v2(-3012,-219) -2822,-219 v2(-2767,-164)
  Bottom Layer w7.87: U2.29@-3425.9,-93.88 -3331.88,-93.88 -3325.39,-87.39 -3263.61,-87.39 -3132,-219 v2(-3012,-219) ; v2(-2767,-164) -2761.67,-164 -2756.67,-159 R5.2@-2720.7,-159
NetR6_2: R6.2 U2.24 | length 524.6
  Bottom Layer w7.87: U2.24@-3446.17,-11.2 -3446.17,6.84 -3434.02,18.99 -3404.01,18.99 -3379.01,43.99 R6.2@-2954.99,43.99
NetR6C_1: R6C.1 U2C.8 | length 78.7
  Top Layer w7.87: R6C.1@1724.88,-296.46 U2C.8@1724.88,-217.72
NetR6R_1: R6R.1 SW1R.A2 | length 91.3
  Top Layer w7.87: SW1R.A2@1043.58,-255.12 1043.58,-259.06 1052.44,-267.91 R6R.1@1127.24,-267.91
NetR7_2: R7.2 U2.26 | length 255.5
  Top Layer w7.87: v2(-3352.59,85.29) -3352.59,81.7 -3326.29,55.4 -3326.29,10.46 -3337,-0.25 v2(-3337,-4)
  Bottom Layer w7.87: U2.26@-3426.49,-46.64 -3403.69,-46.64 -3362.59,-5.54 -3338.54,-5.54 v2(-3337,-4) ; R7.2@-3396.29,85.29 v2(-3352.59,85.29)
NetR7R_1: R7R.1 SW2R.A1 | length 151.6
  Top Layer w7.87: SW2R.A1@1043.58,144.49 R7R.1@1043.58,296.06
NetR9_1: R9.1 U2.23 | length 1266.6
  Top Layer w7.87: v2(-3426.29,48.99) -3426.29,91.71 -3392,126 -3182,126 -3147,91 -3147,-58.17 -3235.08,-146.25 v2(-3235.08,-196.01)
  Bottom Layer w7.87: U2.23@-3461.92,-11.01 U2.23@-3461.92,-10.61 -3461.92,13.36 v2(-3426.29,48.99) ; v2(-3235.08,-196.01) -3235.08,-270.92 -3209.99,-296.01 R9.1@-2802.7,-296.01
NetR14_1: R14.1 U10.6 U10.7 | length 154.3
  Top Layer w13: U10.7@403,-775 U10.6@403,-825 431,-825 441.5,-835.5 R14.1@503,-835.5
NetR16_1: R16.1 U11.6 U11.7 | length 139.7
  Top Layer w13: U11.7@403,-1025 U11.6@403,-1075 483.5,-1075 R16.1@490,-1081.5
NetR21_1: R21.1 U2.20 | length 137.4
  Bottom Layer w7.87: R21.1@-3576.29,85.29 -3576.29,63.99 -3561.29,48.99 -3538.56,48.99 -3509.17,19.6 U2.20@-3509.17,-11.01
NetR22_1: R22.1 U2.21 | length 105.8
  Bottom Layer w7.87: R22.1@-3516.29,85.29 -3516.29,48.99 -3493.42,26.12 U2.21@-3493.42,-11.01
NetR23_1: R23.1 U2.22 | length 105.2
  Bottom Layer w7.87: U2.22@-3477.67,-11.01 -3477.67,22.61 -3456.29,43.99 R23.1@-3456.29,85.29
NetR28_2: R28.2 U2.28 | length 224.3
  Bottom Layer w7.87: U2.28@-3425.9,-78.13 -3380.39,-78.13 -3338.4,-78.13 -3331.91,-71.64 -3234.36,-71.64 -3220.1,-85.9 -3210.35,-85.9 R28.2@-3210.22,-85.78
NetR29_2: R29.2 U1.6 | length 139.2
  Top Layer w16: U1.6@-4045,1102.4 v2(-4045,1179)
  Bottom Layer w16: v2(-4045,1179) -4042.79,1181.21 -4042.79,1201.71 -4017,1227.5 R29.2@-4017,1230
NetR45_1: R45.1 U10.2 U11.2 | length 434.8
  Top Layer w13: R45.1@118,-753.7 121.94,-753.7 143.24,-775 U10.2@217,-775 245,-775 270.37,-800.37 270.37,-999.63 245,-1025 U11.2@217,-1025
NetU1R_8: U1R.8
NetU1R_9: U1R.9
NetU1R_11: U1R.11
NetU1R_15: U1R.15
NetU1R_39: U1R.39
ORIN_PWR: J14.2 Q10.3 R19.1 | length 581.6
  Top Layer w25: J14.2@2008.46,-1045 2026.28,-1062.82 2026.28,-1102.28 2141.5,-1217.5 R19.1@2141.5,-1220
  Bottom Layer w25: Q10.3@1765,-795.5 1765,-803.5 2006.5,-1045 J14.2@2008.46,-1045
ORIN_SW: Q12.1 R43.2 U1R.14 | length 2413.2
  Top Layer w7.87: R43.2@895,571.5 901.96,564.54 v1(978.43,564.54) ; v1@978.43,567.54 979.28,568.39 994.25,568.39 1000.46,574.61 U1R.14@1081.48,574.61
  Bottom Layer w7.87: v1(978.43,564.54) 978.43,297.73 894.01,213.31 842.61,213.31 800,170.7 800,-120.7 705.7,-215 654.3,-215 645.69,-223.61 645.69,-483 852.69,-690 1423.5,-690 Q12.1@1502.5,-769
Pack_in+: C10.1 C11.1 D3.1 F1.2 F2.1 J2.1 SB1.1 U1.1 U1.5 | length 1702.4
  Top Layer w23.62: F2.1@-4199.49,1115 -4199.49,1108.11 -4193.78,1102.4 U1.1@-4135,1102.4 -4107.4,1102.4 -4070,1065 -4009.88,1065 -4001.91,1057.03 -3975.1,1057.03 C11.1@-3975,1057.13 -3893.58,1057.13 -3842.33,1005.88 -3842.33,932.67 v5(-3845,930) ; J2.1@-3880.54,-223.25 -3785,-127.72 -3785,625 v5(-3790,630)
  Bottom Layer w23.62: v5(-3845,930) -3846.54,928.46 -3846.54,819.1 -3790,762.57 v5(-3790,630)
  other v1: -4019.29,-1077.01 -3869.29,-1077.01 -3419.29,-1077.01 -3269.29,-1077.01 -3119.29,-1077.01 -2969.29,-1077.01 -2819.29,-1077.01 -2669.29,-1077.01 -4169.29,-927.01 -4019.29,-927.01 -3869.29,-927.01 -3719.29,-927.01 -3569.29,-927.01 -3269.29,-927.01 -3119.29,-927.01 -2969.29,-927.01 -2819.29,-927.01 -2669.29,-927.01 -2519.29,-927.01 -3420,-925 -4169.29,-777.01 -4019.29,-777.01 -3869.29,-777.01 -3269.29,-777.01 -3119.29,-777.01 -2969.29,-777.01 -2819.29,-777.01 -2669.29,-777.01 -3269.29,-627.01 -3119.29,-627.01 -2969.29,-627.01 -2819.29,-627.01 -2669.29,-627.01 -4169.29,-477.01 -3119.29,-477.01 -2969.29,-477.01 -2819.29,-477.01 -2669.29,-477.01
PHYS_KILL_REPORT: Q7.3 R35.2 U1R.13 | length 698.2
  Top Layer w7.87: v1(952.62,601.38) 958.07,601.38 969.09,590.35 U1R.13@1081.48,590.35
  Bottom Layer w7.87: Q7.3@741,170 777.81,170 784.25,176.44 784.25,201.52 815.17,232.44 853.94,232.44 R35.2@870,248.5 872.5,248.5 888.56,264.56 888.56,267.06 950,328.5 950,559.99 952.62,562.61 v1(952.62,601.38)
QSPI_SCLK_RP2040: U1R.52 U2R.6 | length 286.6
  Top Layer w7.87: U1R.52@1177.44,812.3 1177.44,875 1215.63,913.19 1258.29,913.19 1283.74,938.64 1283.74,974.8 1260.12,998.43 U2R.6@1238.46,998.43
QSPI_SD0_RP2040: U1R.53 U2R.5 | length 178.4
  Top Layer w7.87: U1R.53@1161.69,812.3 1161.69,889.57 1220.55,948.43 U2R.5@1238.46,948.43
QSPI_SD1_RP2040: U1R.55 U2R.2 | length 427.3
  Top Layer w7.87: U2R.2@958.94,1048.43 937.28,1048.43 909.72,1020.87 909.72,1008.27 909.67,1008.21 909.67,938.64 935.12,913.19 1049.12,913.19 1130.2,832.11 U1R.55@1130.2,812.3
QSPI_SD2_RP2040: U1R.54 U2R.3 | length 309.4
  Top Layer w7.87: U2R.3@958.94,998.43 1037.09,998.43 1145.94,889.57 U1R.54@1145.94,812.3
QSPI_SD3_RP2040: U1R.51 U2R.7 | length 339.2
  Top Layer w7.87: U1R.51@1193.19,812.3 1193.19,861.78 1228.36,896.95 1264.32,896.95 1299.49,932.12 1299.49,1009.06 1260.12,1048.43 U2R.7@1238.46,1048.43
QSPI_SS_RP2040: R5R.2 R7R.2 U1R.56 U2R.1 | length 1011.6
  Top Layer w7.87: U2R.1@958.94,1098.43 937.28,1098.43 889,1050.14 889,937.04 951.04,875 998.11,875 R5R.2@1004.21,868.9 1071.14,868.9 U1R.56@1114.45,825.59 ; R7R.2@1043.58,333.46 1043.58,380.42 1076.79,413.62 1095.2,413.62 v2(1122.32,440.75) ; U1R.56@1114.45,812.3 1114.45,792.49 1136.1,770.84 v2(1136.1,601.53)
  Bottom Layer w7.87: v2(1122.32,440.75) 1122.32,587.07 1136.1,600.85 v2(1136.1,601.53)
RP2040_SCL: J10.6 U2.18 | length 2253.1
  Top Layer w7.87: v2(-4576,976) -4526.11,926.11 -4526.11,893.31 -4479.98,847.18 -4420.68,847.18 -4316,951.86 -4316,979.73 -4250.1,1045.63 v2(-4250.1,1048.9)
  Bottom Layer w7.87: v2(-4576,976) -4574.2,977.8 -4574.2,1001.59 J10.6@-4481.42,1094.37 ; v2(-4250.1,1048.9) -4246.91,1048.9 -4230.41,1032.4 -3887.4,1032.4 -3673.19,818.19 -3673.19,72.72 -3634.86,34.39 -3591.23,34.39 -3574.34,17.5 -3551.84,17.5 -3540.66,6.31 U2.18@-3540.66,-10.61 U2.18@-3540.66,-11.01
RP2040_SDA: J10.5 U2.19 | length 1796.8
  Bottom Layer w7.87: J10.5@-4402.68,1094.37 -4397.72,1089.41 -4254.41,1089.41 -4215,1050 -3865,1050 -3655,840 -3655,76.81 -3640.6,62.4 -3596.97,62.4 -3567.81,33.24 -3545.09,33.24 -3524.91,13.07 U2.19@-3524.91,-10.61 U2.19@-3524.91,-11.01
RUN_RP2040: J1R.4 R4R.2 R6R.2 U1R.26 | length 1275.3
  Top Layer w7.87: R6R.2@1164.65,-267.91 1210.54,-267.91 1290.23,-188.22 ; J1R.4@1250.67,-88.19 1290.23,-127.75 1290.23,-188.22 ; U1R.26@1287.68,541.63 1287.68,394.12 1319.17,362.62 1319.17,207.71 1429.41,97.47 v2(1429.41,-8.07) R4R.2@1476.65,-8.07 ; v2(1429.41,-179.97) 1429.41,-181.3 1387.08,-223.63 1325.64,-223.63 1290.23,-188.22
  Bottom Layer w7.87: v2(1429.41,-179.97) v2(1429.41,-8.07)
SCK_RP2CAN: U1C.10 U1R.29 | length 400.1
  Top Layer w7.87: U1R.29@1352.15,574.61 1365.43,574.61 1373.9,566.14 1373.9,404.58 1426.13,352.34 1435.89,352.34 1513.27,274.97 U1C.10@1513.27,254.72
SCL: R33.2 U1R.7 U4.2 U7.8 | length 1704.6
  Top Layer w7.87: v1(-158.54,594.39) -154.69,590.54 -154.69,574.97 -134.65,554.92 U7.8@-134.65,529.33 ; v1@850.34,684.84 U1R.7@1081.48,684.84
  Bottom Layer w7.87: v1(-158.54,594.39) 50.85,385 65,385 80,370 700,370 716.44,353.56 718.94,353.56 735,337.5 R33.2@735,335 751.06,351.06 751.06,370.98 775.69,395.61 775.69,450.39 777.28,451.99 777.28,497.62 794.52,514.86 803.35,514.86 804.84,516.35 805.8,516.35 812.72,523.27 812.72,524.22 820.59,532.09 824.53,532.09 826.5,534.06 U4.2@826.5,538 ; U4.2@825.75,538 825.75,663.19 841,678.44 v1(841,678.78)
SDA: R32.2 U1R.6 U4.1 U7.7 | length 1692.6
  Top Layer w7.87: U7.7@-134.65,722.64 -134.25,722.24 -134.25,665.75 v1(-133.86,665.35) ; v1(815.37,703.88) 816.08,704.59 851.69,704.59 855.69,700.59 U1R.6@1081.48,700.59
  Bottom Layer w7.87: v1(-133.86,665.35) -133.86,613.86 90,390 209.86,390 212.98,386.87 738.87,386.87 757,405 757,500.96 795,538.96 795,541.94 810,556.94 810,669.71 815.19,674.9 815.19,703.7 v1(815.37,703.88)
SOFTWARE_KILL: R36.2 U1R.12 U13.3 | length 3045.3
  Top Layer w7.87: v1(967.52,657.52) 967.52,622.98 984.4,606.1 U1R.12@1081.48,606.1
  Bottom Layer w7.87: U13.3@-177,-582.6 -163.5,-582.6 -141.69,-604.41 -141.69,-672.29 -162.71,-693.31 -282.39,-693.31 -289.31,-686.39 -289.31,175.69 -90,375 -40,375 30,305 285.9,305 370.9,220 540,220 580,260 831.08,260 835.69,264.61 835.69,273.39 842.61,280.31 874.31,280.31 926.81,332.81 926.81,616.81 v1(967.52,657.52)
SOLENOID_CTRL: R18.1 U1R.35 U6.1 | length 2212
  Top Layer w7.87: U1R.35@1352.15,669.09 1589.62,669.09 1780,478.72 1780,220 v1(1910,90)
  Bottom Layer w7.87: v1(1910,90) 1910,-42.41 1901.37,-51.03 1901.37,-445.94 1885,-462.31 1885,-510.44 1903.56,-510.44 1903.56,-506.26 1904,-505.82 1904,-505 1966.69,-442.31 1966.69,-423.31 1980.19,-409.81 2019.81,-409.81 2059.93,-369.69 2322.39,-369.69 2348.01,-395.31 2389.62,-395.31 2419,-424.69 U6.1@2419,-447.5
Solenoid_Out: J17.2 Q4.3 | length 220.3
  Bottom Layer w40: Q4.3@2100,-784.5 2175.5,-709 J17.2@2289,-709
SWCLK_RP2040: J1R.3 U1R.24 | length 606.9
  Top Layer w7.87: J1R.3@1250.67,-38.19 1286.11,-2.75 1286.11,351.15 1256.18,381.07 U1R.24@1256.18,541.63
SWDIO_RP2040: J1R.1 U1R.25 | length 718.6
  Top Layer w7.87: U1R.25@1271.93,541.63 1271.93,387.6 1301.85,357.67 1301.85,202.28 1411.11,93.03 1411.11,11.78 1375.7,-23.63 1345.77,-23.63 1331.21,-38.19 J1R.1@1300.67,-38.19
TERM_DET_RP2CAN: R1C.2 SW1C.3 U1C.9 | length 734.9
  Top Layer w7.87: SW1C.3@1344.76,-313.19 1344.76,-301.38 1403.02,-243.12 1422.71,-243.12 v2(1468.78,-197.05) ; v2(1429.41,204.53) 1431.61,202.32 1431.61,186.29 1444.87,173.03 R1C.2@1463.27,173.03 U1C.9@1463.27,254.72
  Bottom Layer w7.87: v2(1429.41,204.53) 1429.41,47.05 1468.78,7.68 v2(1468.78,-197.05)
USB_N: J16.2 R3R.1 | length 221.6
  Top Layer w8: J16.2@1414.41,1200 1410.54,1196.13 1410.54,1166.77 1409.61,1165.85 1409.61,1100.88 1415.3,1095.2 1415.3,1011.34 1419.98,1006.66 1436.4,1006.66 R3R.1@1440.3,1002.76
USB_P: J16.3 R2R.1 | length 221.6
  Top Layer w8: R2R.1@1374.29,1002.76 1378.19,1006.66 1394.61,1006.66 1399.3,1011.34 1399.3,1088.57 1393.61,1094.25 1393.61,1165.85 1392.69,1166.77 1392.69,1196.13 J16.3@1388.82,1200
USB_RP2040_N: R3R.2 U1R.46 | length 267.4
  Top Layer w7.87: U1R.46@1271.93,812.3 1271.93,857.71 1310.25,896.03 1369.53,896.03 1415.17,941.67 1415.17,957.02 1419.78,961.63 1436.58,961.63 R3R.2@1440.3,965.35
USB_RP2040_P: R2R.2 U1R.47 | length 267.4
  Top Layer w7.87: U1R.47@1256.18,812.3 1256.18,864.23 1303.73,911.78 1363.01,911.78 1399.42,948.19 1399.42,957.02 1394.81,961.63 1378.01,961.63 R2R.2@1374.29,965.35
V+: C2.1 C12.1 C13.1 D2.1 Q2.2 Q8.1 Q8.2 Q8.3 Q9.1 Q9.2 Q9.3 R3.1 R8.1 R25.1 R29.1 R38.1 R44.1 R48.1 U5.1 U5.3 U10.1 U10.8 U11.1 U11.8 U13.5 | length 1263.5
  Top Layer w7.87: -3142,371 -3102.75,331.75 -3102.75,25.46 -3112.59,15.61 v2(-3112.59,11)
  Top Layer w10: R44.1@-766.5,-1266 -765,-1264.5 v1(-765,-1220)
  Top Layer w13: v1(164,-724) 165,-725 U10.1@217,-725 ; U11.1@217,-975 217,-948.12 224.46,-940.67 v1(224.46,-936.61) ; v1(345,-738) 353.5,-729.5 398.5,-729.5 U10.8@403,-725 ; v1(347,-974) 347.5,-974.5 402.5,-974.5 U11.8@403,-975
  Bottom Layer w7.87: R8.1@-3207.59,11.63 -3154.68,11.63 C2.1@-3151.29,8.24 ; C2.1@-3147,13.13 -3114.72,13.13 v2(-3112.59,11)
  Bottom Layer w10: v1(-765,-1220) -760,-1220 -720,-1180 -720,-965 -649,-894
  Bottom Layer w23: -100,-740 -105.87,-734.13 -105.87,-639.38 -88,-621.5 U13.5@-64.5,-621.5
  other v1: -3339.29,382.99 -3339.29,512.99 -3209.29,512.99 -3339.29,642.99 -3209.29,642.99 -3339.29,772.99 -3209.29,772.99 -3079.29,772.99 -2559.29,772.99 -2429.29,772.99 -2299.29,772.99 -2169.29,772.99 -2039.29,772.99 -1909.29,772.99 -1779.29,772.99 -1649.29,772.99 -1519.29,772.99 -1389.29,772.99 -1259.29,772.99 -1129.29,772.99 -3339.29,902.99 -3209.29,902.99 -3079.29,902.99 -2949.29,902.99 -2819.29,902.99 -2689.29,902.99 -2559.29,902.99 -2429.29,902.99 -2299.29,902.99 -2169.29,902.99 -2039.29,902.99 -1909.29,902.99 -1779.29,902.99 -1649.29,902.99 -1519.29,902.99 -1389.29,902.99 -1259.29,902.99 -3339.29,1032.99 -3209.29,1032.99 -3079.29,1032.99 -2949.29,1032.99 -2819.29,1032.99 -2689.29,1032.99 -2559.29,1032.99 -2429.29,1032.99 -2299.29,1032.99 -2169.29,1032.99 -2039.29,1032.99 -1909.29,1032.99 -1779.29,1032.99 -1649.29,1032.99 -1519.29,1032.99 -1389.29,1032.99 -3339.29,1162.99 -3209.29,1162.99 -3079.29,1162.99 -2949.29,1162.99 -2819.29,1162.99 -2689.29,1162.99 -2559.29,1162.99 -2429.29,1162.99 -2299.29,1162.99 -2169.29,1162.99 -2039.29,1162.99 -1909.29,1162.99 -1779.29,1162.99 -1649.29,1162.99 -1519.29,1162.99 -3339.29,1292.99 -3209.29,1292.99 -3079.29,1292.99 -2949.29,1292.99 -2819.29,1292.99 -2689.29,1292.99 -2559.29,1292.99 -2429.29,1292.99 -2299.29,1292.99 -2169.29,1292.99 -2039.29,1292.99 -1909.29,1292.99 -1779.29,1292.99 -1649.29,1292.99 -1519.29,1292.99
Vreg: C22.1 C24.1 J1.10 J1.11 PS1.1 PS2.1 R40.1 R50.1 U5.2 | length 371.9
  Top Layer w10: R40.1@-1104.29,1024.49 -1100,1020.2 v1(-1100,955) ; v1(-26.5,983.5) -26.5,953.63 R50.1@-17.75,944.88
  Bottom Layer w10: -27,1241 -27,984 v1(-26.5,983.5) v1@-26,983
Vreg_MEAS: R50.2 R54.1 U7.3 | length 228.9
  Top Layer w7.87: R50.2@49.25,944.88 R54.1@49.25,854.33 49.25,851.83 65.35,835.72 U7.3@65.35,722.64
Wake: C9.1 J10.3 R1.1 U1.3 | length 519.9
  Top Layer w7.87: v2(-4250.16,980.03) -4246.64,983.54 -4246.64,1005.62 -4224.66,1027.6 -4124.56,1027.6 -4118.5,1021.54 R1.1@-4118.5,950 R1.1@-4118.5,947.5 ; R1.1@-4134.56,931.44 R1.1@-4118.5,947.5 ; C9.1@-4102.13,875 -4102.13,931.13 R1.1@-4118.5,947.5
  Bottom Layer w7.87: J10.3@-4402.68,1015.63 -4269.01,1015.63 -4263.44,1010.06 -4263.44,998.64 -4250.16,985.35 v2(-4250.16,980.03)
XIN_RP2040: C1R.1 U1R.20 Y1R.1 | length 443.1
  Top Layer w7.87: C1R.1@1113.07,196.65 1114.35,197.93 1114.35,220.28 1138.07,244 Y1R.1@1138.07,283.27 1132.17,283.27 1098.7,316.73 1098.7,379.81 1112.39,393.5 1161.69,393.5 1193.19,425 U1R.20@1193.19,541.63
XOUT_RP2040: R1R.1 U1R.21 | length 82.1
  Top Layer w7.87: U1R.21@1208.94,541.63 1208.94,480.2 1220.75,468.38 R1R.1@1224.69,468.38
pads on no net: J1. J1R.A J1R.B J1R.C J1R.D J1R.E J1R.F J1R.G J2.8 J3.8 J4.8 J5. J8.3 J12.8 J14. J16.1 J16.4 J17.3 SW1R.A1 SW2R.A2 U1C.3 U1C.5 U1C.8 U10.3 U11.3

## Polygon pours and split planes (outlines as drawn)
V+ on Bottom Layer "Bottom Layer-V+ 2" (solid, remove dead copper, pour order 153): -1560,-30 -677,-913 -71,-913 2,-986 2,-1347 93,-1440 640,-1440 640,-1025 625,-1010 498,-1010 366,-878 366,-867 366,-744 327,-705 130,-705 -453,-705 -1020,-138 -1020,728.25 -1277.87,986.13 -1277.87,1423.87 -1020,1423.87 -1020,1437.5 -1560,1437.5
12V on Bottom Layer "Bottom Layer-15V" (solid, remove dead copper, pour order 156): 2481,-512 2548,-445 2548,-216 2600,-164 2600,-83 2494,23 2086,23 1932,177 1932,257 1965,290 2050,290 2086,254 2086,177 2121,142 2567,142 2760.77,-51.77 2760.77,-615.78 2768.8,-623.8 2768.8,-1206.2 2555,-1420 1683,-1420 1384,-1121 1384,-988 1255,-859 593,-859 355,-621 355,-155 420,-90 550,-90 570,-71 634.84,-71 644,-80.16 644,-106 576,-174 576,-512 777,-713 1333,-713 1532,-912 1532,-1022 1555,-1045 1690,-1046 1701,-1057 1701,-1191 1731,-1221 2171.61,-1221 2460,-932.61 2460,-621 2196,-621 2140,-565 2140,-400 2270,-400 2270,-435 2347,-512
Vreg on Bottom Layer "VREG_L02_P158" (solid, remove dead copper, pour order 158): -1221,1019 -1118,916 -1041,916 -991,966 -991,1038
GND_RP2CAN on Bottom Layer "GND_RP2CAN_L02_P190" (solid, remove dead copper, pour order 190): -1550,-51.08 -683.08,-918 -77.35,-918 -6.03,-989.33 -6.03,-1347 0.23,-1347 82.7,-1437.5 2682.5,-1437.5 2870,-1250 2870,1350 2782.5,1437.5 -1550,1437.5
GND_RP2CAN on Bottom Layer "GND_RP2CAN_L02_P189" (solid, remove dead copper, pour order 189): 160,-680 160,-560 340,-560 340,-680
Vreg on Bottom Layer "VREG_L02_P173" (solid, remove dead copper, pour order 173): 659,1225 597,1163 333,1163 270,1225 -133.27,1225 -444.88,913.39 -444.88,1415 1560,1415 2078.02,896.98 2078.02,668.02 2049,639 1975,639 1930,684 1930,763 1944,777 1944,796 1515,1225
BAT- on Bottom Layer "BAT-_L02_P179" (solid, remove dead copper, pour order 179): -4473.68,-1436.32 cw(c-4473.68,-1150.94) -4759.06,-1150.94 -4759.06,1150.94 cw(c-4471.32,1150.94) -4471.32,1438.68 -1550.27,1438.68 -1550.27,-1436.32
GND_RP2CAN on Bottom Layer "GND_RP2CAN_L02_P188" (solid, remove dead copper, pour order 188): -1000,480 -980,500 -900,500 -840,440 -840,145 -910,75 -965,75 -1000,110
Vreg on Bottom Layer "VREG_L02_P186" (solid, remove dead copper, pour order 186): -835,-315 -1000,-150 -1000,15 -950,65 -835,65
Vreg on Bottom Layer "VREG_L02_P157" (solid, remove dead copper, pour order 157): -1270,1005 -995,730 -995,565 -950,520 -820,520 -820,1010 -850,1040 -1270,1040
5V on Bottom Layer "Bottom Layer-5V 1" (solid, remove dead copper, pour order 154): 1849.22,1321.22 1849.36,1302.64 2028,1124 2081.31,1070.69 2081.31,659.18 2053.13,631 1979,631 1920,690 1920,800 1740,980 1503.46,1216.54 660.9,1216.54 551.18,1106.82 551.18,685.04 685.04,685.04 850,850 850,983.86 972.96,1106.82 1440.43,1106.82 1680,867.24 1823.91,710.92 1824,647 1880,591 1880,480 2084.03,480 2115.08,511.05 2115.02,511.11 2115.02,1130.98 1903,1343 1871,1343
Vreg on Bottom Layer "Bottom Layer-Vreg" (solid, remove dead copper, pour order 164): -835,-315 -770,-380 -535,-380 -440.94,-285.95 -440.94,1420 -835,1420
5V on Bottom Layer "Bottom Layer-5V" (solid, remove dead copper, pour order 185): 311.02,580 582.68,580 582.68,1141.2 311.02,1141.2
V+ on Bottom Layer "Bottom Layer-V+ 3" (solid, remove dead copper, pour order 161): -3980,1290.25 -3980,1210 -3950,1180 -3910,1180 -3820,1270 -3525,1270 -3390,1135 -3390,1430 -3980,1430
V+ on Bottom Layer "Bottom Layer-V+ 1" (solid, remove dead copper, pour order 165): -3340,260 -3240,260 -3096.93,403.07 -3096.93,567.69 -2981.49,683.13 -2848.13,683.13 -2840,675 -1290,675 -1290,1437.5 -3400,1437.5 -3400,320
NetQ1_3 on Bottom Layer "NETQ1_3_L02_P171" (solid, pour order 171): -3042,536 -3042,106 -3002.63,66.63 -2931.29,66.63 -2931.29,18.99 -2851.29,-61.01 -1861.01,-61.01 -1800,0 -1800,440 -1928.99,568.99 -3009.01,568.99
Pack_in+ on Bottom Layer "Bottom Layer-Pack_in+" (solid, remove dead copper, pour order 177): -4292,-948 -4080,-1160 -2640,-1160 -2380,-900 -2380,-569.01 -2524.97,-434 -3202,-434 -3321.29,-553.29 -3321.29,-676.29 -3520,-875 -3715,-875 -3750,-840 -3750,-110.24 -4292,-110.24
NetC1_2 on Bottom Layer "Bottom Layer-NetC1_2" (solid, remove dead copper, pour order 174): -2278,-905 -2005,-905 -1940,-840 -1940,-376 -2096,-376 -2106,-366 -2106,-286 -2176,-216 -2278,-216 -2300,-238 -2300,-533.05 -2342,-575.05 -2342,-841
MOTOR_PWR on Bottom Layer "MOTOR_PWR_L02_P155" (solid, remove dead copper, pour order 155): 645,-1420 645,-945 839.22,-945 880,-904.22 1297.92,-904.22 1375,-981.3 1375,-1420
GND_RP2CAN on Bottom Layer "GND" (solid, remove dead copper, pour order 172): 740,1100 740,-480 1886.1,-480 1886.1,1100
V+ on Bottom Layer "Bottom Layer-V+" (solid, remove dead copper, pour order 169): -2664.29,589.09 -2578.38,675 -650,675 -650,1437.5 -2824.63,1437.5 -2824.63,645.37 -2929.29,540.71 -2929.29,294.29 -2880.63,245.63 -2746.66,245.63 -2664.29,327.99
GND_RP2CAN on Top Layer "GND_RP2CAN_L01_P187" (solid, remove dead copper, pour order 187): -1570,-1437.2 -1570,1435 2655,1435 2768.8,1436.89 2768.8,-1429.48 2541,-1429.48
3V3_RP2CAN on Top Layer "3V3_RP2040" (solid, pour order 159): 812.79,996.79 838.11,1022.11 838.11,1128.23 866.88,1157 873,1157.28 1732.79,1157.28 1732.79,-271.46 812.79,-271.46
3V3_RP2CAN on Top Layer "3V3_RP2CAN_L01_P184" (solid, remove dead copper, pour order 184): 695,1125 745,1125 750,1120 750,1060 821,989 821,705 695,705 655,745 655,872 690,907 690,1120
5V on Top Layer "5V_L01_P183" (solid, remove dead copper, pour order 183): 575,1040 660,1040 665,1045 665,1195 615,1195 575,1155
BAT- on Top Layer "BAT-_L01_P167" (solid, remove dead copper, pour order 167): -1857.93,-67.7 -1580.64,-345 -1580.5,-345 -1580.5,-1451.2 -4458.8,-1451.2 cw(c-4458.8,-1140.71) -4769.29,-1140.71 -4769.29,1155.71 cw(c-4501.2,1155.71) -4501.2,1423.8 -3040,1423.8 -3038.8,1423.8 -3038.8,91.06 -3037.55,91.06 -2881.49,-65
BAT- on Top Layer "BAT-_L01_P178" (solid, remove dead copper, pour order 178): -1583.63,-531.37 -1580,-535 -1580,-676.37 -1696.6,-676.37 -1696.6,-531.37
NetQ1_3 on Top Layer "NETQ1_3_L01_P163" (solid, pour order 163): -3042,106 -3042,219 -1800,219 -1800,0 -1861.01,-61.01 -2880.5,-55.5
BAT- on Top Layer "BAT-_L01_P170" (solid, remove dead copper, pour order 170): -1685,-507.04 -1747.04,-507.04 -1755,-515 -1755,-550 -1685,-550
V+ on Top Layer "Top Layer-V+" (solid, remove dead copper, pour order 152): -2825,675 -1020,675 -1020,1437.5 -3400,1437.5 -3400,320 -3340,260 -3240,260
NetQ1_3 on Top Layer "NETQ1_3_L01_P162" (solid, pour order 162): -3042,536 -3042,219 -1800,219 -1800,440 -1928.99,568.99 -3009.01,568.99
Pack_in+ on Top Layer "Top Layer-Pack_in+" (solid, remove dead copper, pour order 151): -4292,-948 -4080,-1160 -2640,-1160 -2380,-900 -2380,-569.01 -2524.97,-434 -3202,-434 -3321.29,-553.29 -3488,-720 -3595,-720 -3802,-513 -3802,-148 -4292,-148
NetC1_2 on Top Layer "Top Layer-NetC1_2" (solid, remove dead copper, pour order 160): -2278,-905 -2005,-905 -1940,-840 -1940,-376 -2096,-376 -2106,-366 -2106,-286 -2176,-216 -2278,-216 -2300,-238 -2300,-533.05 -2342,-575.05 -2342,-841

## Keep-outs
Top Layer:
  lines w10: -4302.96,-479.84 -4302.96,-150.93 -4302.96,-140 -4287.46,-140 -3840,-140 ; -1310,-913.39 -70.87,-913.39 -19.68,-964.57 -19.68,-1437.01
Bottom Layer:
  lines w10: 645,-945 839.22,-945 880,-904.22 1352.22,-904.22 1375,-927 1375,-1420
Keep-Out Layer:
  circle w10: c2550,-1280 r100
  circle w10: c2550,1280 r100
  circle w10: c-3600,-1100 r100
  circle w10: c-3600,1100 r100
  lines w10: -4297.93,-491.97 -4297.93,-948 -4078.95,-1166.98 -3692.31,-1166.98 ; -3800,-510 -3600,-710 -3480,-710 -3200,-430 -2520,-430 -2380,-570 -2380,-900 -2640,-1160 -3510,-1160

## Other copper
Top Layer:
  pour cut-out: 1214.23,605 1164.23,555 1119.23,555 1119.23,645 1154.23,645
  pour cut-out: 1107.14,695.22 1107.36,695 1324.11,695 1324.11,747.61 1296.79,774.93 1224.17,774.93 1209.11,790 1109.11,790
  pour cut-out: 1730,265 1730,475 1725,480 1475,480 1475,340 1535,250
  pour cut-out: 1094.32,397.19 1094.28,397.15 1073.88,397.15 1075,196.58 1086.52,185.06 1091.17,185.06 1091.17,220.63 1115.23,244.69 1115.23,266.86 1100.21,281.87 1100.21,291.87
  pour cut-out: 1352.85,-105.58 1342.11,-101.52 1309.22,-101.52 1303.16,-107.58 1303.16,-137.58 1328.16,-137.58 1338.16,-127.58
Bottom Layer:
  pour cut-out: -3447,-24 -3447,-132.82 -3456.41,-142.23 -3457.09,-141.55 -3527,-141.55 -3527,-29 -3522,-24
  pour cut-out: -3669,-746 -3664,-751 -3664,-881 -3674,-891 -3739,-891 -3744,-886 -3744,-746

## Silkscreen, mask and mechanical layers (free items; w line width, h text height)
Top Overlay:
  lines w10: -4740,990 -4540,990 ; -4740,1060 -4540,1060 ; -4740,1130 -4540,1130 ; -4640,920 -4640,1200 ; 1952,-400 2248,-400 ; 2100,-498.5 2100,-301.5 ; 2320,410 2740,410 ; 2320,520 2740,520 ; 2320,630 2740,630 ; 2320,740 2740,740 ; 2320,850 2740,850 ; 2530,300 2530,960 ; 2320,300 2740,300 ; 2320,300 2320,960 2740,960 2740,300 ; 2320,300 2740,300 ; -4740,920 -4540,920 -4540,1200 -4740,1200 -4740,920 ; 1952,-498.5 2248,-498.5 2248,-301.5 1952,-301.5 1952,-498.5
  text "GND" at 2214.34,1261 h20
  text "5V" at 2124.34,1254 h20
  text "CAN_L" at -4724.99,1153.75 h15
  text "CAN_H" at -4624.99,1153.75 h15
  text "SCL" at -4709.99,1082.5 h15
  text "SDA" at -4609.99,1082.5 h15
  text "BAT-" at -4717.49,1012.5 h15
  text "WAKE" at -4617.49,1012.5 h15
  text "V+" at -4702.5,942.5 h15
  text "BAT+" at -4617.49,942.5 h15
  text "Detect" at 2342.53,885 h30
  text "GND" at 2590.01,885 h30
  text "Thermistor" at -4585,827 h39.37 r270
  text "Vreg 1" at 2340.03,790 h30
  text "GND" at 2590.01,785 h30
  text "Vreg 2" at 2335.03,670 h30
  text "GND" at 2590.01,665 h30
  text "GND" at 2590.72,558 h30
  text "5V" at 2395.01,555 h30
  text "BATT -" at -3729.52,537.27 h59.06 r270
  text "CAN_H" at 2350.02,447.5 h30
  text "CAN_L" at 2560.02,447.5 h30
  text "5V" at 405.01,400 h30
  text "12V" at 2372.51,335 h30
  text "GND" at 2590.01,335 h30
  text "BOOT" at 880.49,136.1 h40 r270
  text "Battery Charge" at -4596.88,-60 h39.37 r270
  text "RESET" at 880.49,-80.12 h40 r270
  text "BATT +" at -3729.52,-232.73 h59.06 r270
  text "TERM / ON" at 1525,-307.71 h40 r270
  text "Kill" at 1995.01,-360 h20
  text "GND" at 2148.34,-360 h20
  text "12V" at 267.51,-375 h30
  text "Aux" at 1998.34,-460 h20
  text "GND" at 2148.34,-460 h20
  text "12V" at 2252.51,-655 h30
  text "GND" at 2367.12,-655 h30
  text "Solenoid" at 2480.04,-825 h30
  text "GND" at -418.29,-869.98 h100
  text "MOTOR+" at 826.76,-879.98 h100
  text "GND" at 2185.01,-959 h30
  text "12V" at 1970.98,-961 h30
  text "ORIN" at 2627.52,-1055 h30
  text "Orin" at 2192.52,-1370 h30
  text "V+ Power" at -897.46,-1410 h30
  text "Motor+" at 1412.53,-1415 h30